# EAGLE board Open Ephys EIB Omnetics 2x16 1 fiber (EAGLE 6.3)
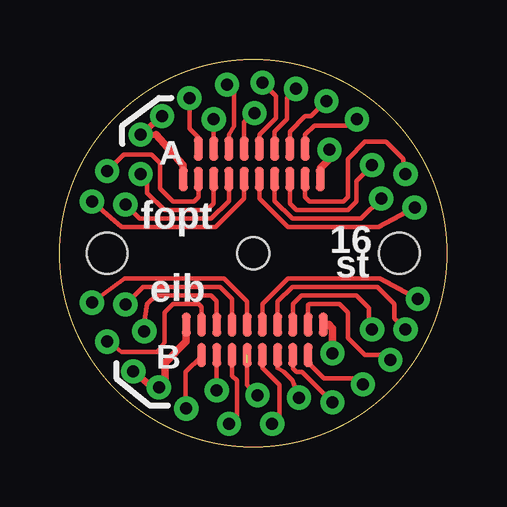
[diagram p0: board, top side]
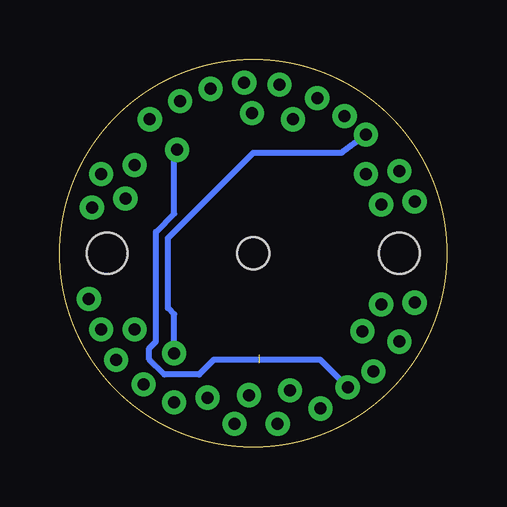
[diagram p1: board, bottom side, seen from below]

Size 16.13 x 16.13 mm. Coordinates in mm from the lower left corner, seen from the top.
Outline: circle at 8.06,8.06 radius 8.06
Copper layers (1*16): Top 0.035mm / dielectric 1.5mm / Bottom 0.035mm
Design rules "default *": minimum track width 7mil, minimum drill 16mil, track to track 7mil, track to pad 7mil, pad to pad 7mil, via to via 7mil, smd to smd 7mil, copper to edge 10mil, drill to drill 7mil, minimum pad ring 10mil, minimum via ring 8mil, stop-mask expansion 4mil, vias tented up to drill 0mil, thermal gap 10mil
Holes 1.7 mm at 1.97,8.06 14.16,8.06
Holes 1.32 mm at 8.06,8.06

## Footprints (pad centres in the part's own frame; a part is rotated, then mirrored left to right if it is on the bottom)
OMNETICS_FE18 = smd 0.381 x 1.016: P$1 -1.905,0.635; P$2 -1.27,0.635; P$3 -0.635,0.635; P$4 0,0.635; P$5 0.635,0.635; P$6 1.27,0.635; P$7 1.905,0.635; P$8 2.54,0.635; P$9 2.54,-0.635; P$10 1.905,-0.635; P$11 1.27,-0.635; P$12 0.635,-0.635; P$13 0,-0.635; P$14 -0.635,-0.635; P$15 -1.27,-0.635; P$16 -1.905,-0.635; P$17 -2.54,0.635; P$18 3.175,0.635
LARGEGOLDPIN = drill 0.5: P1 0,0

## Placement (x,y rotation side)
U$1  OMNETICS_FE18  [OMNETICS_FE18]  7.81,4.46 0 top
U$2  OMNETICS_FE18  [OMNETICS_FE18]  8.32,11.8 180 top
U$3  GOLDPINLARGE  [LARGEGOLDPIN]  13.78,3.62 0 top
U$4  GOLDPINLARGE  [LARGEGOLDPIN]  14.41,4.89 0 top
U$5  GOLDPINLARGE  [LARGEGOLDPIN]  13.02,4.89 0 top
U$6  GOLDPINLARGE  [LARGEGOLDPIN]  14.92,6.16 0 top
U$7  GOLDPINLARGE  [LARGEGOLDPIN]  1.33,6.01 0 top
U$8  GOLDPINLARGE  [LARGEGOLDPIN]  2.73,5.93 0 top
U$9  GOLDPINLARGE  [LARGEGOLDPIN]  3.52,4.81 0 top
U$10  GOLDPINLARGE  [LARGEGOLDPIN]  1.97,4.38 0 top
U$11  GOLDPINLARGE  [LARGEGOLDPIN]  12.64,2.6 0 top
U$12  GOLDPINLARGE  [LARGEGOLDPIN]  11.37,1.84 0 top
U$13  GOLDPINLARGE  [LARGEGOLDPIN]  9.97,2.04 0 top
U$14  GOLDPINLARGE  [LARGEGOLDPIN]  8.85,0.95 0 top
U$15  GOLDPINLARGE  [LARGEGOLDPIN]  8.24,2.15 0 top
U$16  GOLDPINLARGE  [LARGEGOLDPIN]  7.05,0.95 0 top
U$17  GOLDPINLARGE  [LARGEGOLDPIN]  6.54,2.35 0 top
U$18  GOLDPINLARGE  [LARGEGOLDPIN]  5.27,1.59 0 top
U$19  GOLDPINLARGE  [LARGEGOLDPIN]  1.97,11.49 0 top
U$20  GOLDPINLARGE  [LARGEGOLDPIN]  3.37,11.37 0 top
U$21  GOLDPINLARGE  [LARGEGOLDPIN]  2.73,10.1 0 top
U$22  GOLDPINLARGE  [LARGEGOLDPIN]  1.33,10.22 0 top
U$23  GOLDPINLARGE  [LARGEGOLDPIN]  14.8,9.97 0 top
U$24  GOLDPINLARGE  [LARGEGOLDPIN]  13.4,10.35 0 top
U$25  GOLDPINLARGE  [LARGEGOLDPIN]  13.02,11.75 0 top
U$26  GOLDPINLARGE  [LARGEGOLDPIN]  14.41,11.37 0 top
U$27  GOLDPINLARGE  [LARGEGOLDPIN]  12.38,13.65 0 top
U$28  GOLDPINLARGE  [LARGEGOLDPIN]  11.11,14.41 0 top
U$29  GOLDPINLARGE  [LARGEGOLDPIN]  9.84,14.92 0 top
U$30  GOLDPINLARGE  [LARGEGOLDPIN]  11.37,3.9 0 top
U$31  GOLDPINLARGE  [LARGEGOLDPIN]  11.24,12.38 0 top
U$32  GOLDPINLARGE  [LARGEGOLDPIN]  8.45,15.18 0 top
U$33  GOLDPINLARGE  [LARGEGOLDPIN]  8.12,13.91 0 top
U$34  GOLDPINLARGE  [LARGEGOLDPIN]  6.97,15.1 0 top
U$35  GOLDPINLARGE  [LARGEGOLDPIN]  6.41,13.65 0 top
U$36  GOLDPINLARGE  [LARGEGOLDPIN]  5.4,14.54 0 top
U$37  GOLDPINLARGE  [LARGEGOLDPIN]  4.25,13.78 0 top
U$38  GOLDPINLARGE  [LARGEGOLDPIN]  3.37,13.02 0 top
U$39  GOLDPINLARGE  [LARGEGOLDPIN]  3.06,3.14 0 top
U$40  GOLDPINLARGE  [LARGEGOLDPIN]  4.13,2.48 0 top

## Library data of the parts
U$1-U$40 = josh

## Nets
N$1: U$2.P$15 U$28.P1
N$2: U$2.P$14 U$29.P1
N$3: U$1.P$8 U$3.P1
N$4: U$1.P$7 U$5.P1
N$5: U$1.P$6 U$4.P1
N$6: U$1.P$5 U$6.P1
N$7: U$1.P$4 U$7.P1
N$8: U$1.P$3 U$8.P1
N$9: U$1.P$2 U$9.P1
N$10: U$1.P$1 U$10.P1
N$11: U$1.P$16 U$18.P1
N$12: U$1.P$15 U$17.P1
N$13: U$1.P$14 U$16.P1
N$14: U$1.P$13 U$15.P1
N$15: U$1.P$12 U$14.P1
N$16: U$1.P$11 U$13.P1
N$17: U$1.P$10 U$12.P1
N$18: U$1.P$9 U$11.P1
N$19: U$2.P$1 U$26.P1
N$20: U$2.P$2 U$25.P1
N$21: U$2.P$3 U$24.P1
N$22: U$2.P$4 U$23.P1
N$23: U$2.P$5 U$22.P1
N$24: U$2.P$6 U$21.P1
N$25: U$2.P$7 U$20.P1
N$26: U$2.P$8 U$19.P1
N$27: U$2.P$9 U$36.P1
N$28: U$2.P$10 U$35.P1
N$29: U$2.P$11 U$34.P1
N$30: U$2.P$12 U$33.P1
N$31: U$2.P$13 U$32.P1
N$32: U$2.P$16 U$27.P1
N$33: U$1.P$17 U$2.P$17 U$31.P1 U$39.P1 U$40.P1
REF1: U$1.P$18 U$2.P$18 U$30.P1 U$37.P1 U$38.P1

## Tracks (layer width: path | path; a pad name or v marks a point on that pad's centre or on a via)
N$1
  Top 0.178: U$2.P$15 9.59,13.14 10.22,13.78 10.48,13.78 U$28.P1
N$2
  Top 0.178: U$2.P$14 8.95,13.14 9.46,13.65 9.46,14.54 U$29.P1
N$3
  Top 0.178: U$1.P$8 10.35,5.91 10.4,5.96 11.65,5.96 12,5.6 12,4.53 12.71,3.82 13.58,3.82 U$3.P1
N$4
  Top 0.178: U$1.P$7 9.72,5.96 10.07,6.31 12.36,6.31 12.89,5.78 12.89,5.02 U$5.P1
N$5
  Top 0.178: U$1.P$6 9.08,6.06 9.69,6.67 13.25,6.67 13.96,5.96 13.96,5.35 U$4.P1
N$6
  Top 0.178: U$1.P$5 8.45,5.96 9.51,7.02 13.35,7.02 U$6.P1
N$7
  Top 0.178: U$1.P$4 7.81,6.06 6.85,7.02 2.71,7.02 U$7.P1
N$8
  Top 0.178: U$1.P$3 7.18,6.16 6.67,6.67 3.47,6.67 U$8.P1
N$9
  Top 0.178: U$1.P$2 6.54,6.08 6.31,6.31 4,6.31 3.64,5.96 3.47,4.86 U$9.P1
N$10
  Top 0.178: U$1.P$1 5.91,5.83 5.78,5.96 4.71,5.96 4.36,5.6 4.36,4.36 4.05,3.95 2.58,3.95 U$10.P1
N$11
  Top 0.178: U$1.P$16 5.91,3.77 5.25,3.11 5.25,1.61 U$18.P1
N$12
  Top 0.178: 6.54,3.75 U$17.P1
  Top 0.254: 6.54,3.75 U$1.P$15
N$13
  Top 0.178: U$1.P$14 7.18,2.96 7.38,2.76 7.38,1.28 U$16.P1
N$14  (1 unrouted)
  Top 0.178: 7.81,3.49 7.81,2.58 U$15.P1
N$15
  Top 0.178: U$1.P$12 8.45,3.29 9.16,2.58 9.16,1 U$14.P1
N$16
  Top 0.178: U$1.P$11 9.08,3.29 9.33,3.11 9.69,2.76 U$13.P1
N$17
  Top 0.178: U$1.P$10 9.72,3.26 9.87,3.11 10.1,3.11 U$12.P1
N$18
  Top 0.178: U$1.P$9 10.35,3.52 11.01,2.86 12.38,2.86 U$11.P1
N$19
  Top 0.178: U$2.P$1 10.22,10.4 10.4,10.22 11.82,10.22 12,10.4 12,12 12.71,12.71 13.6,12.71 14.31,12 14.31,11.47 U$26.P1
N$20
  Top 0.178: U$2.P$2 9.59,10.15 9.87,9.87 12,9.87 12.36,10.22 12.36,11.09 U$25.P1
N$21
  Top 0.178: U$2.P$3 8.95,10.25 9.69,9.51 12.56,9.51 U$24.P1
N$22
  Top 0.178: U$2.P$4 8.32,10.35 9.51,9.16 13.27,9.16 U$23.P1
N$23
  Top 0.178: U$2.P$5 7.68,10.35 6.49,9.16 2.58,9.16 U$22.P1
N$24
  Top 0.178: U$2.P$6 7.05,10.25 6.31,9.51 3.31,9.51 U$21.P1
N$25
  Top 0.178: U$2.P$7 6.41,10.15 6.13,9.87 4.36,9.87 3.64,10.58 3.64,11.09 U$20.P1
N$26
  Top 0.178: U$2.P$8 5.78,10.4 5.6,10.22 4.71,10.22 4.18,10.76 4.18,11.82 3.82,12.18 2.65,12.18 U$19.P1
N$27
  Top 0.178: U$2.P$9 5.78,12.89 5.4,13.27 U$36.P1
N$28
  Top 0.178: U$2.P$10 U$35.P1
N$29
  Top 0.178: 7.05,12.38 7.05,13.02 7.25,13.37 7.25,14.77 U$34.P1
  Top 0.254: U$2.P$11 7.05,12.38
N$30
  Top 0.178: U$33.P1 7.68,13.53 U$2.P$12
N$31
  Top 0.178: U$2.P$13 8.32,13.02 9,13.7 9,14.62 U$32.P1
N$32
  Top 0.178: 10.22,12.64 10.22,13.02 10.6,13.4 12.13,13.4 U$27.P1
  Top 0.254: U$2.P$16 10.22,12.64
N$33
  Top 0.305: U$31.P1 11.24,12 10.86,11.62 U$2.P$17 | U$1.P$17 5.27,4.38 4.38,3.49 4.38,2.73 U$40.P1 3.87,2.48 U$39.P1
  Bottom 0.254: 11.11,12.26 U$31.P1 11.37,12.26 11.37,9.72 12.13,8.95 12.13,4.38 12.41,4.1 12.41,3.64 11.77,3.01 10.33,3.01 9.72,3.62 5.27,3.62 U$40.P1
REF1
  Top 0.254: 4,13.02 U$38.P1 U$37.P1
  Top 0.305: 4,13.02 5.14,11.75 U$2.P$18 | U$1.P$18 11.21,5.09 11.37,4.94 U$30.P1
  Bottom 0.254: U$30.P1 11.37,5.52 11.62,5.78 11.62,8.7 8.06,12.26 4.38,12.26 U$38.P1

## Text on the board
tNames: A | fopt | 16 | st | eib | B